# Altium PCB powersupply.PcbDoc
Units mm, origin at the board's own origin, x right, y up, seen from the top; angles counter-clockwise.
Board outline 39 x 48.3 mm, 2 copper layers (Top Layer, Bottom Layer); 12 components, 6 nets, 29 pads, 0 vias.
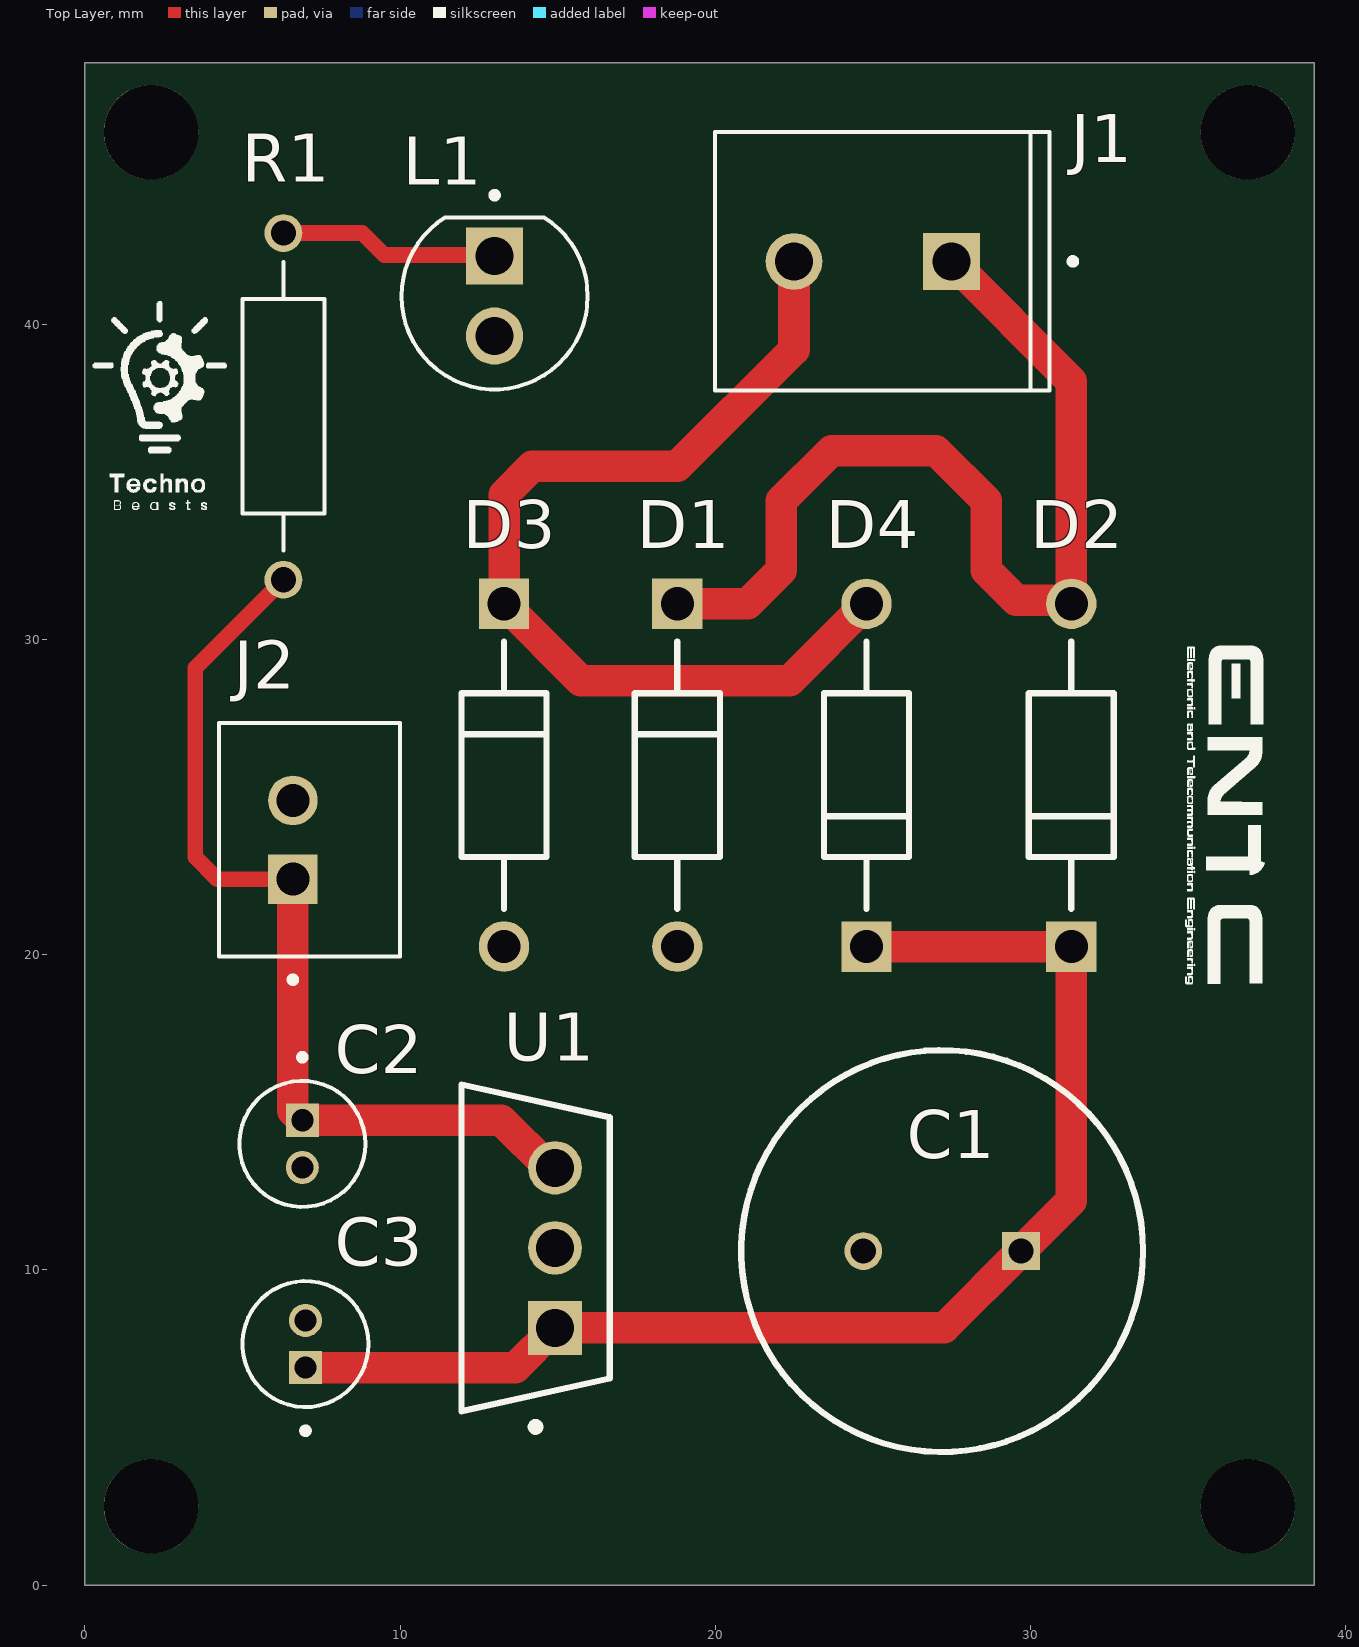
[diagram p0: Top Layer view]
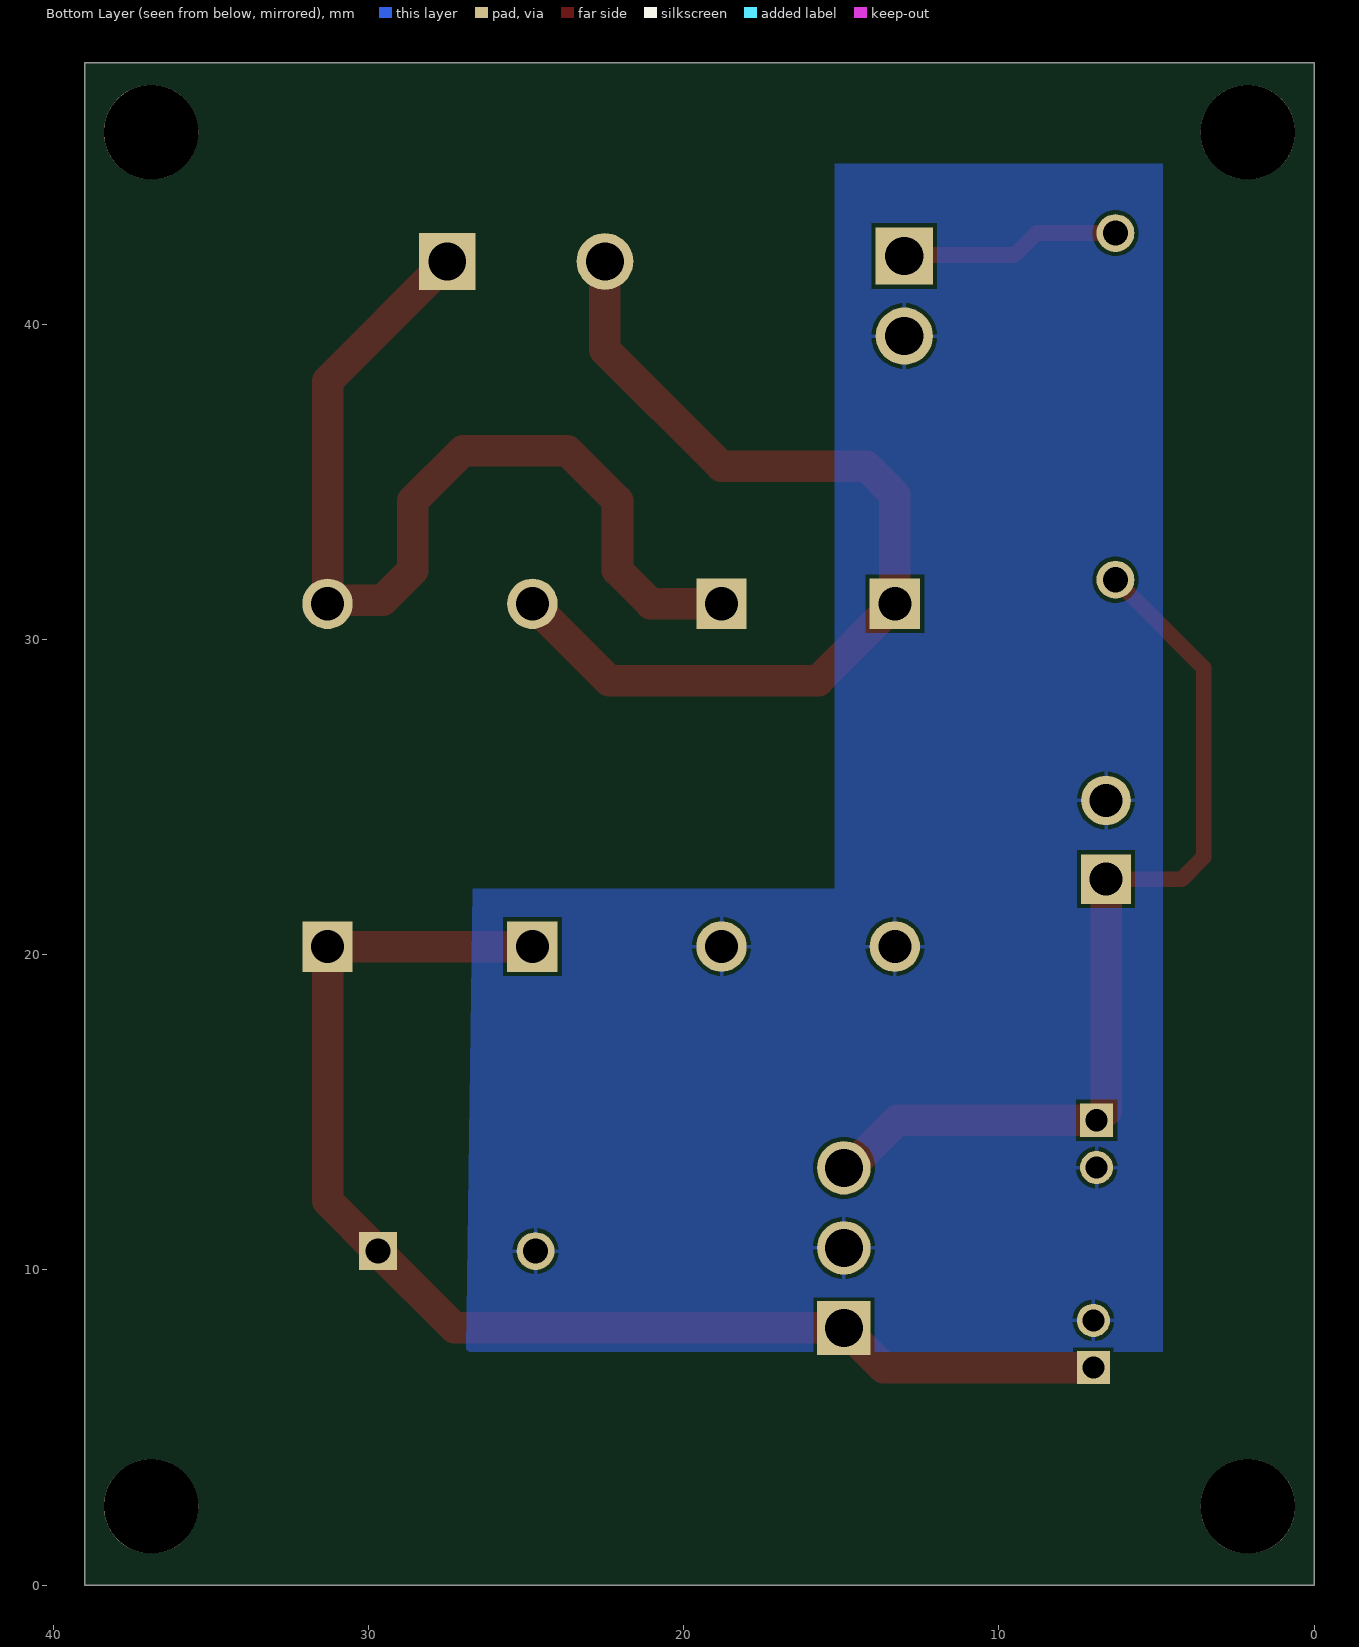
[diagram p1: Bottom Layer view, seen from below]
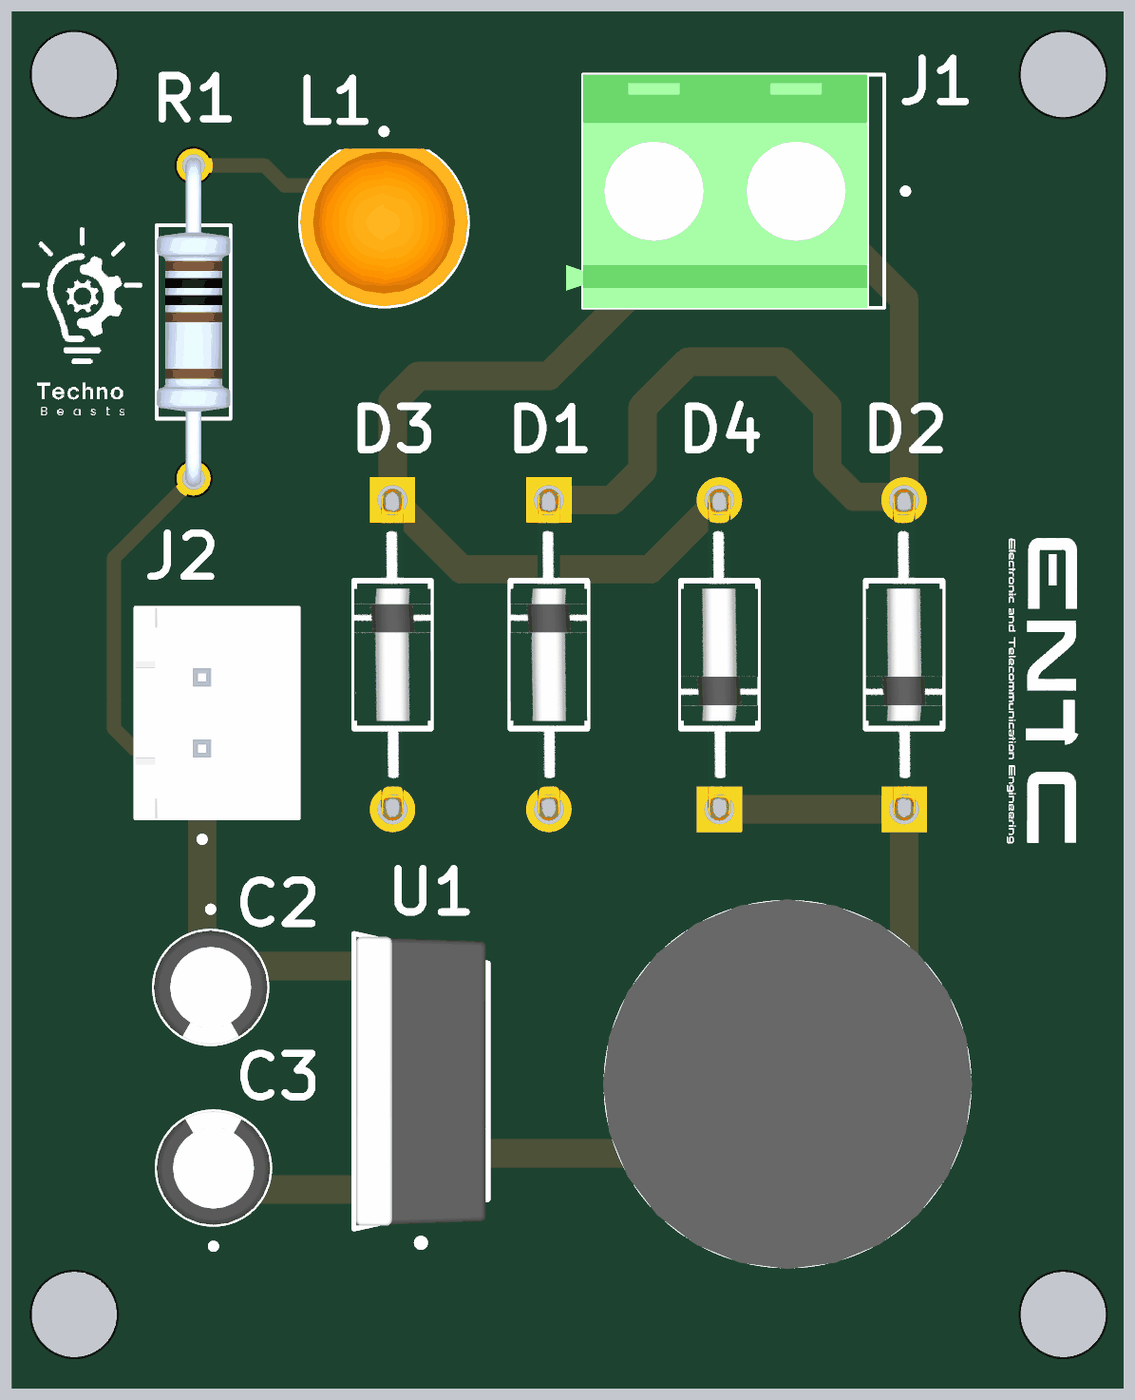
[diagram p2: 3D render of the assembled board from above, using the file's embedded part models]

## Layer stack, top to bottom
Top Solder: solder mask 0.0102, Solder Resist, Dk 3.5
Top Layer: signal copper 0.0356
Dielectric 1: dielectric 0.32, FR-4, Dk 4.8
Bottom Layer: signal copper 0.0356
Bottom Solder: solder mask 0.0102, Solder Resist, Dk 3.5

## Board outline
0,0 39,0 39,48.3 0,48.3

## Design rules (kind name [scope] priority, off if disabled: settings)
BoardOutlineClearance [All] p1: gap=0.2 ignorepadtopadclearanceinfootprint=FALSE
Clearance [All] p1: gap=0.127 ignorepadtopadclearanceinfootprint=FALSE except(0.25: Arc-Hole Track-Hole SMDPad-Hole THPad-Hole Via-Hole Fill-Hole Poly-Hole Region-Hole Text-Hole)
ComponentClearance [All] p1: gap=0.127 collisioncheckmode=3 verticalgap=0.127 showdistances=TRUE
DiffPairsRouting [All] p1: maxlimit=0.254 minlimit=0.127 mostfreqgap=0.127 toplayer_minwidth=0.127 toplayer_maxwidth=25.4 toplayer_prefwidth=0.127 bottomlayer_minwidth=0.127 bottomlayer_maxwidth=25.4 bottomlayer_prefwidth=0.127 maxuncoupledlength=12.7
Height [All] p1: minheight=0 maxheight=1816.048 prefheight=12.7
HoleSize [All] p1: absolutevalues=TRUE maxlimit=6.3 minlimit=0.3 maxpercent=80.000 minpercent=20.000
HoleToHoleClearance [All] p1: gap=0.25 allowstackedmicrovias=FALSE
MinimumAnnularRing [All] p1: minimumring=0.076
MinimumSolderMaskSliver [All] p1: minsoldermaskwidth=0
PlaneClearance [All] p1: clearance=0.127
PlaneConnect PlaneConnectPowerPads [InPadClass('PowerPads')] p1: planeconnectstyle=Direct reliefexpansion=0.508 reliefentries=4 reliefconductorwidth=0.254 reliefairgap=0.254
PlaneConnect [All] p2: pad.planeconnectstyle=Relief pad.reliefexpansion=0.3 pad.reliefentries=4 pad.reliefconductorwidth=0.127 pad.reliefairgap=0.127 via.planeconnectstyle=Direct via.reliefexpansion=0.3 via.reliefentries=4 via.reliefconductorwidth=0.127 via.reliefairgap=0.127
PolygonConnect PolygonConnectPowerPads [All vs (InPadClass('PowerPads'))] p1: connectstyle=Direct reliefconductorwidth=0.254 reliefentries=4 polygonreliefangle="90 Angle" airgapwidth=0.254
PolygonConnect [All] p2: thpad.connectstyle=Relief thpad.reliefconductorwidth=0.127 thpad.reliefentries=4 thpad.polygonreliefangle="90 Angle" thpad.airgapwidth=0.127 smdpad.connectstyle=Relief smdpad.reliefconductorwidth=0.127 smdpad.reliefentries=4 smdpad.polygonreliefangle="90 Angle" smdpad.airgapwidth=0.127 via.connectstyle=Direct via.reliefconductorwidth=0.127 via.reliefentries=4 via.polygonreliefangle="90 Angle" via.airgapwidth=0.127
RoutingVias [All] p1: holewidth=0.3 width=0.6 viastyle="Through Hole" minholewidth=0.3 minwidth=0.6 maxholewidth=0.6 maxwidth=6.6
SilkToSilkClearance [All] p1: silktosilkclearance=0
SilkToSolderMaskClearance [IsPad] p1: minsilkscreentomaskgap=0.127 clearancetoexposedcopper=TRUE
SolderMaskExpansion [All] p1: expansion=0.075 istentingtop=FALSE
Width [All] p1: maxlimit=25.4 minlimit=0.127 preferedwidth=0.127 minimp=50.000000 maximp=50.000000 favimp=50.000000
20 further rules are at their usual default settings.

## Components (designator, comment, footprint, x,y, rotation, side; value= is the part's Value field where it differs from the comment)
C1 "MAL217255222E3" CAPPRD500W60D1275H2200 29.7,10.6 r180 top value=2200uF
C2 "100nF" "100nF_Capacitor - duplicate" 6.9,14 r270 top
C3 "330nF" "330nF_Capacitor - duplicate1" 7,7.65 r90 top
D1 "1N4001-E3/73" FP-1N4001-E3-73-MFG 18.8,25.7 r270 top value=15pF
D2 "1N4001-E3/73" FP-1N4001-E3-73-MFG 31.3,25.7 r90 top value=15pF
D3 "1N4001-E3/73" FP-1N4001-E3-73-MFG 13.3,25.7 r270 top value=15pF
D4 "1N4001-E3/73" FP-1N4001-E3-73-MFG 24.8,25.7 r90 top value=15pF
J1 "282836-2" TE_282836-2 25,42 r180 top
J2 "B2B-XH-A(LF)(SN)" JST_B2B-XH-A(LF)(SN) 7.125,23.65 r270 top
L1 "WP7113SRD/J4" LEDRD254W57D500H1070 13,40.9 r270 top
R1 "CFM12JT1K00" Resister 6.3,37.4 r270 top value=1kR
U1 "UA7810CKCS" FP-KCS0003B-MFG 14.3,10.7 r180 top

## Footprints (in the part's own frame and the unit in brackets; to place one, negate y for a bottom-side part, rotate by r counter-clockwise, add the part's x,y. Pads: shape width x height; smd on the part's side, far side on the other; paste and mask are expansions set on the pad)
"100nF_Capacitor - duplicate" [mm]
  rect 1.05x1.05 hole 0.7: 1(-0.75,0)
  round 1.05 hole 0.7: 2(0.75,0)
  silkscreen extent -2.85,-2 2,2, body extent -2,-2 2,2, height 7
"330nF_Capacitor - duplicate1" [mm]
  rect 1.05x1.05 hole 0.7: 1(-0.75,0)
  round 1.05 hole 0.7: 2(0.75,0)
  silkscreen extent -2.85,-2 2,2, body extent -2,-2 2,2, height 7
CAPPRD500W60D1275H2200 [mm]
  rect 1.2x1.2 / inner round 1.2 / far side rect 1.2x1.2 hole 0.8: 1(0,0)
  round 1.2 hole 0.8: 2(5,0)
  silkscreen extent -3.88,-6.37 8.87,6.37, body extent -3.99,-6.5 9,6.5, height 22
FP-1N4001-E3-73-MFG [mm]
  rect 1.6x1.6 hole 1.05 paste-1000 mask+0: 1(-5.438,0)
  round 1.6 hole 1.05 paste-1000 mask+0: 2(5.438,0)
  silkscreen extent -4.24,-1.35 4.24,1.35, body extent -5.83,-1.35 5.83,1.35, height 2.7
FP-KCS0003B-MFG [mm]
  rect 1.7x1.7 hole 1.2 paste-1000 mask+0: 1(-0.617,2.54)
  round 1.7 hole 1.2 paste-1000 mask+0: 2(-0.617,0) 3(-0.617,-2.54)
  silkscreen extent -2.35,-5.18 2.35,5.8, body extent -2.45,-5.28 2.45,5.28, height 0.25
JST_B2B-XH-A(LF)(SN) [mm]
  rect 1.575x1.575 / inner round 1.575 / far side rect 1.575x1.575 hole 1.05: 1(1.25,-0.525)
  round 1.575 hole 1.05: 2(-1.25,-0.525)
  silkscreen extent -3.7,-2.88 4.54,2.88, body extent -3.7,-2.88 3.7,2.88, height 7
LEDRD254W57D500H1070 [mm]
  round 1.815 hole 1.21: 1(1.27,0)
  rect 1.815x1.815 / inner round 1.815 / far side rect 1.815x1.815 hole 1.21: 2(-1.27,0)
  silkscreen extent -3.3,-2.96 2.96,2.96, body extent -2.6,-2.95 2.95,2.95, height 9.1
Resister [mm]
  round 1.2 hole 0.8: 1(-5.5,0) 2(5.5,0)
  silkscreen extent -4.58,-1.3 4.58,1.3, body extent -5.77,-1.3 5.77,1.3, height 2.6
TE_282836-2 [mm]
  rect 1.8x1.8 / inner round 1.8 / far side rect 1.8x1.8 hole 1.2: 1(-2.5,0)
  round 1.8 hole 1.2: 2(2.5,0)
  silkscreen extent -6.45,-4.1 5,4.1, body extent -5,-4.1 5.6,4.1, height 10

## Part data
C1: "Aluminum Electrolytic Capacitors Radial Miniature, Low Impedance, Automotive Grade", Manufacturer_Name=Vishay, Mouser Part Number=594-MAL217255222E3, Datasheet Link=https://www.vishay.com/docs/28499/172rlx.pdf, Geometry.Height=22mm, Manufacturer_Part_Number=MAL217255222E3, Mouser Price/Stock=https://www.mouser.co.uk/ProductDetail/Vishay/MAL217255222E3?qs=vvQtp7zwQdMUHaQVE2Z5WQ%3D%3D
C2: "Aluminum Electrolytic Capacitor, Polarized, Aluminum (wet), 50V, 20% +Tol, 20% -Tol, 100nF, Through Hole Mount", Capacitor Type=Aluminium, Leakage Current=3uA, Manufacturer=Panasonic, Manufacturer Part Number=EEA-GA1C100, Manufacturer Series=GA, Max Operating Temperature=105°C, Min Operating Temperature=-55°C, Package Shape=Cylindrical, Package Style=RadialMeter, Rated DC Voltage (URdc)=16V, Ripple Current=30mA, Supplier Part Number=667-EEA-GA1C100, Tolerance  (fill in as +-)=20%, Capacitance=100nF, Category="Aluminum Electrolytic Capacitors", ComponentLink1Description=https://datasheet.ciiva.com:443/pdfs/VipMasterIC/IC/PANA/PANA-S-A0007980152/PANA-S-A0007980152-1.pdf?src-supplier=IHS+Markit, ComponentLink1URL=https://datasheet.ciiva.com:443/pdfs/VipMasterIC/IC/PANA/PANA-S-A0007980152/PANA-S-A0007980152-1.pdf?src-supplier=IHS+Markit, ComponentLink2Description=https://datasheet.ciiva.com/11783/0900766b800bd184-11783675.pdf?src-supplier=Rs, ComponentLink2URL=https://datasheet.ciiva.com/11783/0900766b800bd184-11783675.pdf?src-supplier=Rs, ComponentLink3Description=https://datasheet.ciiva.com/30132/61aba0000ce99-30132280.pdf?src-supplier=Onlinecomponents.com, ComponentLink3URL=https://datasheet.ciiva.com/30132/61aba0000ce99-30132280.pdf?src-supplier=Onlinecomponents.com, ComponentLink4Description=https://datasheet.ciiva.com/2984/aba0000ce99-2984970.pdf?src-supplier=Avnet, ComponentLink4URL=https://datasheet.ciiva.com/2984/aba0000ce99-2984970.pdf?src-supplier=Avnet, ComponentLink5Description=https://datasheet.ciiva.com/14606/70256146-14606495.pdf?src-supplier=Allied+Electronics, ComponentLink5URL=https://datasheet.ciiva.com/14606/70256146-14606495.pdf?src-supplier=Allied+Electronics, ComponentLink6Description=https://datasheet.ciiva.com/43461/1521263-43461069.pdf?src-supplier=Farnell, ComponentLink6URL=https://datasheet.ciiva.com/43461/1521263-43461069.pdf?src-supplier=Farnell, ComponentLink7Description=https://datasheet.ciiva.com/24024/aba0000ce99-48764-24024622.pdf?src-supplier=Mouser, ComponentLink7URL=https://datasheet.ciiva.com/24024/aba0000ce99-48764-24024622.pdf?src-supplier=Mouser, Diameter=4mm, Dielectric Material=Aluminium, JESD-609 Code=e3, Length=7mm, Mounting Technology="Through Hole", Packaging=Bulk, Pins=2, Polarity=Polarized, Pricing="1=0.32, 10=0.216, 50=0.144, 100=0.123, 1000=0.086, 10000=0.086 (USD)", Reach SVHC Compliant=Yes, RoHS=Yes, RoHS Compliant=Yes, Series=EEA-GA, Stock=3224, Supplier=Mouser, Tan Delta=0.18, Terminal Finish=Tin, Terminal Pitch=1.5mm, Termination=Wire, Tolerance (fill in as +-)=20%, Voltage=16V
C3: "Ceramic Capacitor, Ceramic, 16V, 10% +Tol, 10% -Tol, SL0, 120ppm/Cel TC, 330nF, Through Hole Mount", Capacitor Type=Ceramic, Manufacturer="Vishay BCcomponents", Manufacturer Part Number=S220K25SL0N63L6R, Supplier Part Number=594-S220K25SL0N63L6R, Voltage=16V, Capacitance=330nF, Category="Ceramic Capacitors", ComponentLink1Description=https://datasheet.ciiva.com:443/pdfs/VipMasterIC/IC/VISH/VISH-S-A0003941534/VISH-S-A0003941534-1.pdf?src-supplier=IHS+Markit, ComponentLink1URL=https://datasheet.ciiva.com:443/pdfs/VipMasterIC/IC/VISH/VISH-S-A0003941534/VISH-S-A0003941534-1.pdf?src-supplier=IHS+Markit, ComponentLink2Description=https://datasheet.ciiva.com/148/geninfo-cd-rfi-safcaps-148963.pdf?src-supplier=Digi-Key, ComponentLink2URL=https://datasheet.ciiva.com/148/geninfo-cd-rfi-safcaps-148963.pdf?src-supplier=Digi-Key, ComponentLink3Description=https://datasheet.ciiva.com/7974/gapkap-7974888.pdf?src-supplier=Element14, ComponentLink3URL=https://datasheet.ciiva.com/7974/gapkap-7974888.pdf?src-supplier=Element14, Dielectric Material=Ceramic, Pins=2, Pricing="1=0.4, 10=0.197, 50=0.197, 100=0.169, 1000=0.107, 10000=0.095 (USD)", RoHS=Yes, RoHS Compliant=Yes, Stock=23582, Supplier=Mouser
D1 D2 D3 D4: library part CMP-02540-000001-1, "DIODE GEN PURP 50V 1A DO204AL", Capacitance=15pF, Forward Current=1A, Manufacturer=Vishay, Max Junction Temp=+150°C, Max Repetitive Reverse Voltage=50V, Max Surge Forward Current=30A, Peak Reverse Current=5uA, Temperature="-50°C to +150°C", Temperature Range Low=-50°C, Automotive=No, Category=Diode, ComponentLink2Description=Datasheet, ComponentLink2URL=http://www.vishay.com/docs/88503/1n4001.pdf, Device Class L1="Discrete Semiconductors", Device Class L2=Diodes, Device Class L3="Rectifier Diodes", Digikey Description="DIODE GEN PURP 50V 1A DO204AL", Height=2.7mm, Ipc Land Pattern Name=DIOPA1088W105L520D270, Lead Free=Yes, Manufacturer Part Number=1N4001-E3/73, Mouser Description="Rectifiers Vr/50V Io/1A", Octopart=https://octopart.com/1n4001-e3%2F73-vishay-42330130, Package=1N4001-E3/73, Reverse Voltage=50V, RoHS=TRUE, Temperature Range High=+150°C
J1: "Terminal Block Connector Wire Receptacle 2 5 mm 30-16 AWG Green 13.5 A 300 V", Package=None, Check_prices=https://www.snapeda.com/parts/282836-2/TE+Connectivity+AMP+Connectors/view-part/?ref=eda, MF="TE Connectivity", MP=282836-2, SnapEDA_Link=https://www.snapeda.com/parts/282836-2/TE+Connectivity+AMP+Connectors/view-part/?ref=snap
J2: "Connector Header Through Hole 2 position 0.098 (2.50mm)", Package=None, Check_prices=https://www.snapeda.com/parts/B2B-XH-A(LF)(SN)/JST+Sales+America+Inc./view-part/?ref=eda, MF="JST Sales America Inc.", MP=B2B-XH-A(LF)(SN), SnapEDA_Link=https://www.snapeda.com/parts/B2B-XH-A(LF)(SN)/JST+Sales+America+Inc./view-part/?ref=snap
L1: "LED Uni-Color SB. Red 660nm 2-Pin T-1 3/4 Bulk", Manufacturer=Kingbright, Supplier Part Number=754-2139-ND, Category=LEDs, ComponentLink1Description=http://www.kingbrightusa.com/images/catalog/SPEC/WP7113SRD-J4.pdf?src-supplier=Digi-Key, ComponentLink1URL=http://www.kingbrightusa.com/images/catalog/SPEC/WP7113SRD-J4.pdf?src-supplier=Digi-Key, Manufacturer Part Number=WP7113SRD/J4, Pricing="1=0.69, 10=0.448, 100=0.2936, 1000=0.23175, 2000=0.2163, 5000=0.20858, 10000=0.20549, 25000=0.20085 (USD)", RoHS=No, Stock=14375, Supplier=Digi-Key
R1: "Fixed Resistor, Carbon Film, 0.5W, 1000ohm, 350V, 5% +/-Tol, -400,0ppm/Cel, Through Hole Mount", Manufacturer="Stackpole Electronics", Max Operating Temperature=155°C, Min Operating Temperature=-55°C, Package Diameter=2.3mm, Package Length=6mm, Package Shape=Tubular, Package Style=AxialMeter, Power=500mW, Rated Temperature=70°C, Resistance=1K, Resistor Type="FIXED RESISTOR", Supplier Part Number=S1KHCT-ND, Temperature Coefficient=400ppm/°C, Tolerance=5%, Working Voltage=350V, Category="Through-Hole Resistors", ComponentLink1Description=https://datasheet.ciiva.com:443/pdfs/VipMasterIC/IC/SEIE/SEIE-S-A0009883960/SEIE-S-A0009883960-1.pdf?src-supplier=IHS+Markit, ComponentLink1URL=https://datasheet.ciiva.com:443/pdfs/VipMasterIC/IC/SEIE/SEIE-S-A0009883960/SEIE-S-A0009883960-1.pdf?src-supplier=IHS+Markit, ComponentLink2Description=http://components.arrow.com/part/dataview/51859118S46073N1174?src-supplier=Arrow+Electronics, ComponentLink2URL=http://components.arrow.com/part/dataview/51859118S46073N1174?src-supplier=Arrow+Electronics, ComponentLink3Description=https://www.seielect.com/Catalog/SEI-CF_CFM.pdf?src-supplier=Digi-Key, ComponentLink3URL=https://www.seielect.com/Catalog/SEI-CF_CFM.pdf?src-supplier=Digi-Key, ComponentLink4Description=https://www.seielect.com/catalog/SEI-Packaging.pdf?src-supplier=Digi-Key, ComponentLink4URL=https://www.seielect.com/catalog/SEI-Packaging.pdf?src-supplier=Digi-Key, ComponentLink5Description=https://www.seielect.com/catalog/SEI-CF_CFM.pdf?src-supplier=Avnet, ComponentLink5URL=https://www.seielect.com/catalog/SEI-CF_CFM.pdf?src-supplier=Avnet, ComponentLink6Description=https://www.verical.com/server-webapp/html/getDatasheet?partID=470997&src-supplier=Verical, ComponentLink6URL=https://www.verical.com/server-webapp/html/getDatasheet?partID=470997&src-supplier=Verical, Construction=Tubular, JESD-609 Code=e3, Lead Diameter=0.55mm, Lead Length=28mm, Manufacturer Part Number=CFM12JT1K00, Mounting Technology="Through Hole", Packaging="Tape and Reel", Pins=2, Pricing="1=0.1, 10=0.067, 25=0.0488, 50=0.0372, 100=0.0274, 250=0.02092, 500=0.01672, 1000=0.01231 (USD)", Reach SVHC Compliant=Yes, RoHS=Yes, RoHS Compliant=Yes, Stock=145304, Supplier=Digi-Key, Technology="CARBON FILM", Terminal Finish=Tin, Termination=Wire
U1: library part CMP-04917-000126-1, "IC REG LINEAR 10V 1.5A TO220-3", Case/Package=TO-220, Dropout Voltage=2V, Max Input Voltage=28V, Max Operating Temperature=125°C, Max Output Current=1.5A, Max Output Voltage=10.5V, Min Input Voltage=12.5V, Min Operating Temperature=0°C, Min Output Voltage=9.5V, Nominal Output Voltage=10V, Package Quantity=50, Power Supply Rejection Ratio (PSRR)=71dB, Quiescent Current=8mA, Height=8.7mm, Lead Free="Lead Free", Length=10.16mm, Mount="Through Hole", Number of Outputs=1, Number of Pins=3, Number of Regulators=1, Output Current=1.5A, Output Type=Fixed, Output Voltage=10V, Packaging=Rail/Tube, Polarity=Positive, Radiation Hardening=No, REACH SVHC="No SVHC", RoHS Compliant=Yes, Weight=0.067197oz, Width=4.58mm

## Free pads (board coordinates)
  round 3 hole 3 unplated: 12(2.1,46.1) 13(36.9,46.1) 14(36.9,2.5) 15(2.1,2.5)

## Nets (pads, with @x,y where several pads share a name; then routed paths per layer and width w, separated by ;. In a path a pad name is that pad's centre, name@x,y a point inside that pad or via, vN(x,y) a via of type N, cw(c..) or ccw(c..) an arc to the next point about the centre after c; other vN are vias at no path point)
0: D3.1 D4.2 J1.2 | length 30.9
  Top Layer w1: J1.2 22.5,39.2 18.8,35.5 14.2,35.5 13.3,34.6 D3.1 15.738,28.7 22.362,28.7 D4.2
12V: D1.1 D2.2 J1.1 | length 31.5
  Top Layer w1: D1.1 21.038,31.138 22.1,32.2 22.1,34.4 23.7,36 27,36 28.6,34.4 28.6,32.2 29.547,31.253 31.185,31.253 D2.2 31.3,38.2 J1.1
+10V: C2.1 J2.1 R1.2 U1.3 | length 29.8
  Top Layer w0.5: R1.2 3.5,29.1 3.5,23.1 4.2,22.4 J2.1
  Top Layer w1: J2.1 6.6,15.05 C2.1 13.218,14.75 14.728,13.24 U1.3
GND: C1.2 C2.2 C3.2 D1.2 D3.2 J2.2 L1.1 U1.2
L: L1.2 R1.1 | length 7
  Top Layer w0.5: R1.1 8.8,42.9 9.5,42.2 12.97,42.2 L1.2
vin: C1.1 C3.1 D2.1 D4.1 U1.1 | length 41.1
  Top Layer w1: C3.1 13.657,6.9 U1.1 27.26,8.16 C1.1 31.3,12.2 D2.1 D4.1

## Polygon pours and split planes (outlines as drawn)
GND on Bottom Layer "GND_L02_P001" (solid, pour order 1): 15.2,45.1 15.2,22.1 26.7,22.1 26.9,7.4 4.8,7.4 4.8,45.1

## Silkscreen, mask and mechanical layers (free items; w line width, h text height)
Top Overlay:
  drawing of 73 lines, arcs and shapes, not listed
Board:
  lines w0.2: 0,48.2 0,0.2 0.2,0 38.9,0 38.9,48.2 0.1,48.2